# EAGLE board connector (EAGLE 7.3.0)
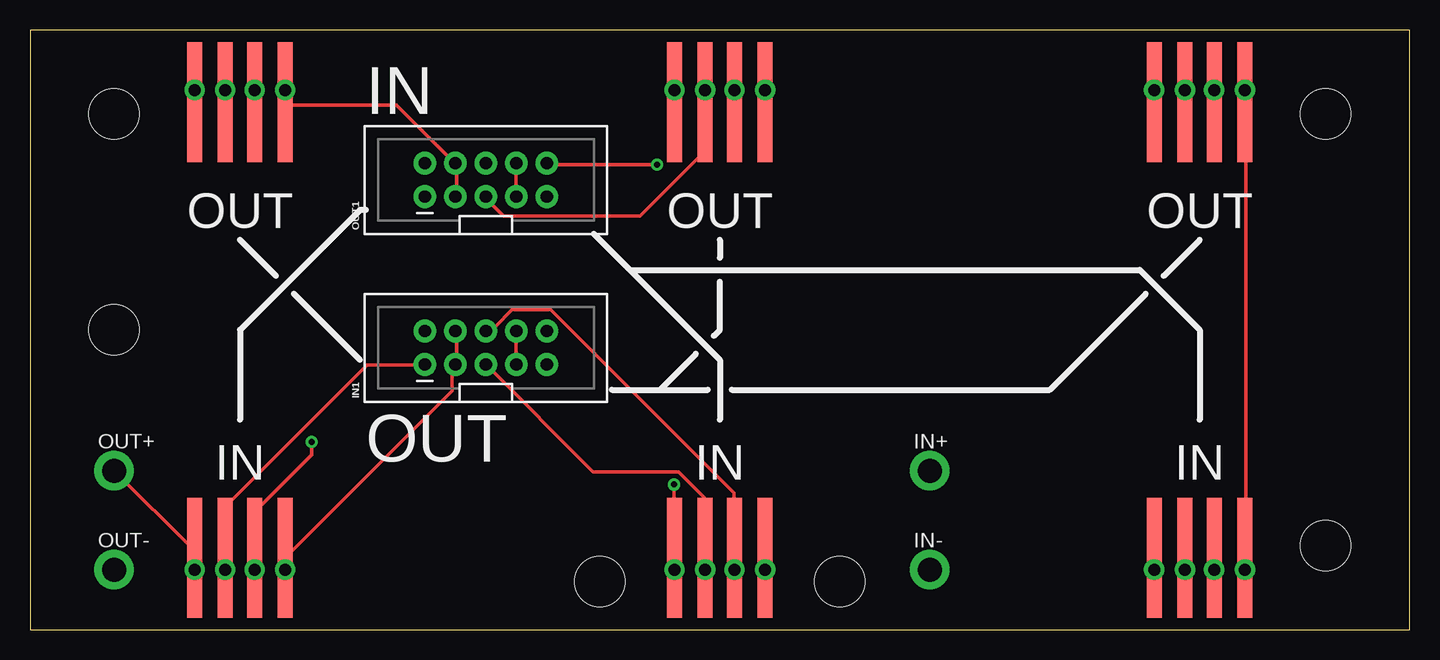
[diagram p0: board, top side]
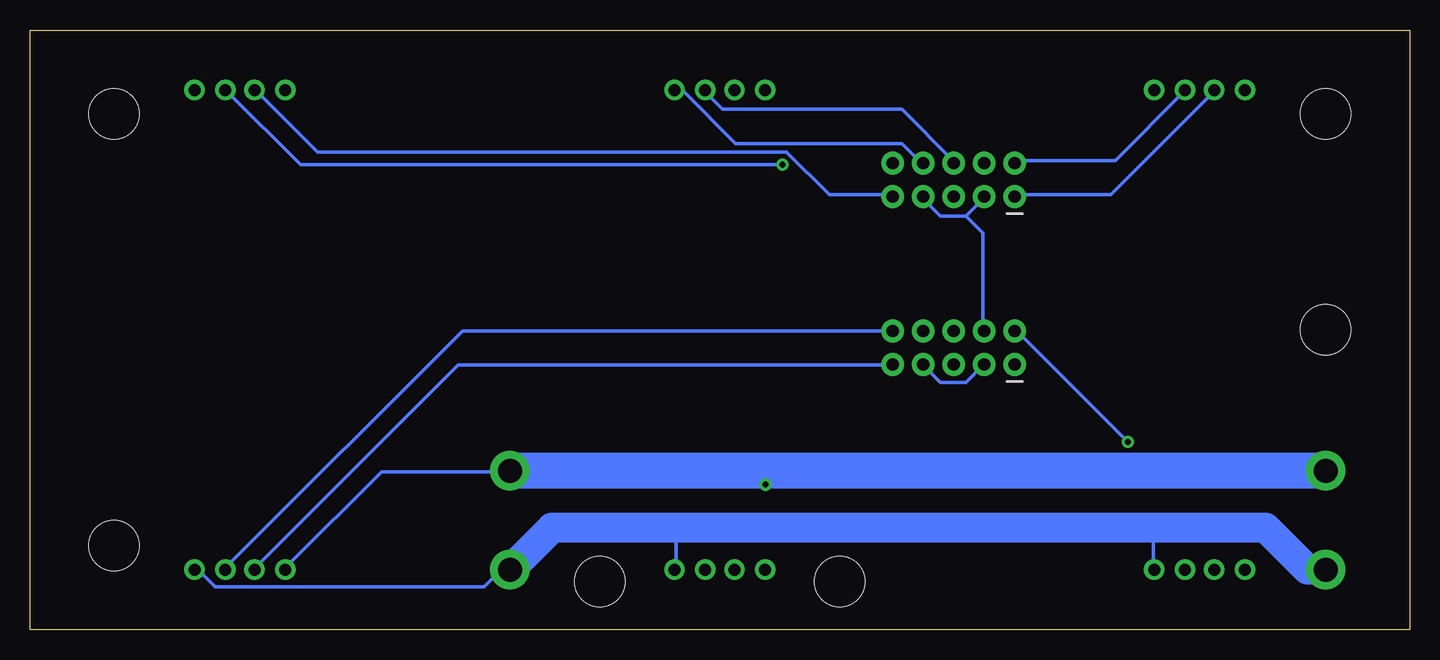
[diagram p1: board, bottom side, seen from below]

Size 115 x 50 mm. Coordinates in mm from the lower left corner, seen from the top.
Outline: 0,0 115,0 115,50 0,50 0,0
Copper layers (1*16): Top 0.035mm / dielectric 1.5mm / Bottom 0.035mm
Design rules "myRules_18_10_14 *": minimum track width 12mil, minimum drill 20mil, track to track 16mil, track to pad 14mil, pad to pad 8mil, via to via 12mil, smd to smd 8mil, copper to edge 10mil, drill to drill 8mil, minimum pad ring 12mil, minimum via ring 10mil, stop-mask expansion 4mil, vias tented up to drill 25mil, thermal gap 10mil
Holes 4.2 mm at 7,43 7,25 47.5,4 67.5,4 108,43 108,7

## Footprints (pad centres in the part's own frame; a part is rotated, then mirrored left to right if it is on the bottom)
2X5-SHROUDED_LOCK = drill 1.016 pad 1.88: 1 -1.397,5.08; 2 1.397,5.08; 3 -1.397,2.54; 4 1.397,2.54; 5 -1.397,0; 6 1.397,0; 7 -1.397,-2.54; 8 1.397,-2.54; 9 -1.397,-5.08; 10 1.397,-5.08
1X01_2MM = drill 2 pad 3.302: 1 0,0
APA102STRIP = smd 1.27 x 10: 5V 3.775,1; CLOCK 1.225,1; DATA -1.225,1; GND -3.775,1 | drill 1 pad 1.7: 5V2 3.775,0; CLOCK2 1.225,0; DATA2 -1.225,0; GND2 -3.775,0

## Placement (x,y rotation side)
IN1  [2X5-SHROUDED_LOCK]  38,23.5 90 top
IN+  [1X01_2MM]  75,13.25 0 top
IN-  [1X01_2MM]  75,5 0 top
INSTRIP1  APA102STRIP  [APA102STRIP]  17.5,5 0 top
INSTRIP2  APA102STRIP  [APA102STRIP]  57.5,5 0 top
INSTRIP3  APA102STRIP  [APA102STRIP]  97.5,5 0 top
OUT1  [2X5-SHROUDED_LOCK]  38,37.5 90 top
OUT+  [1X01_2MM]  7,13.25 0 top
OUT-  [1X01_2MM]  7,5 0 top
OUTSTRIP1  APA102STRIP  [APA102STRIP]  17.5,45 180 top
OUTSTRIP2  APA102STRIP  [APA102STRIP]  57.5,45 180 top
OUTSTRIP3  APA102STRIP  [APA102STRIP]  97.5,45 180 top

## Library data of the parts
IN1 OUT1 = SparkFun-Connectors; PROD_ID: CONN-08671; SF_ID: PRT-08506
IN+ IN- OUT+ OUT- = SparkFun-Connectors
INSTRIP1-INSTRIP3 OUTSTRIP1-OUTSTRIP3 = LucasParis

## Nets
GND: IN1.3 IN1.4 IN1.7 IN1.8 IN-.1 INSTRIP1.5V INSTRIP1.5V2 INSTRIP2.5V INSTRIP2.5V2 INSTRIP3.5V INSTRIP3.5V2 OUT1.3 OUT1.4 OUT1.7 OUT1.8 OUT-.1 OUTSTRIP1.GND OUTSTRIP1.GND2 OUTSTRIP2.GND OUTSTRIP2.GND2 OUTSTRIP3.GND OUTSTRIP3.GND2
N$1: IN1.9 INSTRIP3.DATA INSTRIP3.DATA2
N$2: IN1.10 INSTRIP3.CLOCK INSTRIP3.CLOCK2
N$3: IN1.5 INSTRIP2.DATA INSTRIP2.DATA2
N$4: IN1.6 INSTRIP2.CLOCK INSTRIP2.CLOCK2
N$5: IN1.1 INSTRIP1.DATA INSTRIP1.DATA2
N$6: IN1.2 INSTRIP1.CLOCK INSTRIP1.CLOCK2
N$8: IN+.1 INSTRIP1.GND INSTRIP1.GND2 INSTRIP2.GND INSTRIP2.GND2 INSTRIP3.GND INSTRIP3.GND2 OUT+.1
N$9: OUT1.9 OUTSTRIP3.CLOCK OUTSTRIP3.CLOCK2
N$10: OUT1.10 OUTSTRIP3.DATA OUTSTRIP3.DATA2
N$11: OUT1.5 OUTSTRIP2.CLOCK OUTSTRIP2.CLOCK2
N$12: OUT1.6 OUTSTRIP2.DATA OUTSTRIP2.DATA2
N$13: OUT1.1 OUTSTRIP1.CLOCK OUTSTRIP1.CLOCK2
N$14: OUT1.2 OUTSTRIP1.DATA OUTSTRIP1.DATA2

## Tracks (layer width: path | path; a pad name or v marks a point on that pad's centre or on a via)
GND
  Top 0.305: OUTSTRIP2.GND2 61.16,44.81 61.16,44.09 OUTSTRIP2.GND | OUTSTRIP1.GND2 21.34,44.81 21.34,44.09 OUTSTRIP1.GND 21.34,43.74 30.58,43.74 35.2,39.12 OUT1.4 35.56,38.76 35.56,36.27 OUT1.3 | IN1.4 35.56,24.89 35.56,22.4 IN1.3 35.2,22.05 35.2,19.91 21.34,6.04 INSTRIP1.5V 21.34,5.69 21.34,5.33 INSTRIP1.5V2 | IN1.7 40.54,22.4 IN1.8 | OUT1.7 40.54,36.27 40.54,38.76 OUT1.8 | OUTSTRIP3.GND2 101.35,44.81 101.35,44.09 OUTSTRIP3.GND 101.35,43.74 101.35,6.04 INSTRIP3.5V 101.35,5.69 101.35,5.33 INSTRIP3.5V2 | INSTRIP2.5V2 61.16,5.33 61.16,5.69 INSTRIP2.5V
  Bottom 0.305: IN1.3 35.56,22.05 36.98,20.62 39.12,20.62 40.54,22.05 IN1.7 | 36.98,34.49 35.56,35.92 OUT1.3 | 36.98,34.49 39.12,34.49 40.54,35.92 OUT1.7 | 36.98,34.49 35.56,33.07 35.56,25.25 IN1.4 | OUTSTRIP2.GND2 61.16,44.81 60.45,44.81 56.19,40.54 42.32,40.54 40.89,39.12 OUT1.8 | 21.34,8.5 21.34,5.33 INSTRIP1.5V2 | 61.16,8.5 61.16,5.33 INSTRIP2.5V2 | INSTRIP3.5V2 100.99,4.98 99.57,3.56 77.17,3.56 76.1,4.62 IN-.1
  Bottom 2.5: OUT-.1 8.5,5 12,8.5 21.34,8.5 61.16,8.5 71.5,8.5 IN-.1
N$1
  Top 0.305: INSTRIP3.DATA2 96.37,5.33 96.37,5.69 INSTRIP3.DATA
  Bottom 0.305: IN1.9 43.38,22.05 79.3,22.05 96.01,5.33 INSTRIP3.DATA2
N$2
  Top 0.305: INSTRIP3.CLOCK2 98.86,5.33 98.86,5.69 INSTRIP3.CLOCK
  Bottom 0.305: IN1.10 43.38,24.89 78.94,24.89 98.5,5.33 INSTRIP3.CLOCK2
N$3
  Top 0.305: INSTRIP2.DATA2 56.19,5.33 56.19,5.69 INSTRIP2.DATA 56.19,6.04 56.19,11.02 54.05,13.16 46.94,13.16 38.05,22.05 IN1.5
N$4
  Top 0.305: INSTRIP2.CLOCK2 58.67,5.33 58.67,5.69 INSTRIP2.CLOCK 58.67,6.04 58.67,11.38 43.38,26.67 40.18,26.67 38.76,25.25 38.05,25.25 IN1.6
N$5
  Top 0.305: INSTRIP1.DATA2 16.36,5.33 16.36,5.69 INSTRIP1.DATA 16.36,6.04 16.36,10.31 28.09,22.05 32.72,22.05 IN1.1
N$6  (via drill 0.51)
  Top 0.305: INSTRIP1.CLOCK2 18.85,5.33 18.85,5.69 INSTRIP1.CLOCK 18.85,6.04 18.85,9.96 23.47,14.58 v23.47,15.65
  Bottom 0.305: v23.47,15.65 32.72,24.89 IN1.2
N$8  (via drill 0.51)
  Top 0.305: INSTRIP2.GND2 53.7,5.33 53.7,5.69 INSTRIP2.GND 53.7,6.04 v53.7,12.09 | INSTRIP1.GND2 13.87,5.33 13.87,5.69 INSTRIP1.GND 13.51,6.04 13.51,6.76 7.11,13.16 OUT+.1 | INSTRIP3.GND2 93.88,5.33 93.88,5.69 INSTRIP3.GND
  Bottom 0.305: IN+.1 76.45,13.16 85.7,13.16 93.52,5.33 INSTRIP3.GND2 | v53.7,12.09 53.7,13.25
  Bottom 3: OUT+.1 53.7,13.25 IN+.1
N$9
  Top 0.305: OUTSTRIP3.CLOCK2 96.37,44.81 96.37,44.09 OUTSTRIP3.CLOCK
  Bottom 0.305: OUT1.9 43.38,36.27 48.36,36.27 51.92,39.83 91.03,39.83 96.01,44.81 OUTSTRIP3.CLOCK2
N$10  (via drill 0.51)
  Top 0.305: OUTSTRIP3.DATA2 98.86,44.81 98.86,44.09 OUTSTRIP3.DATA | v52.27,38.76 43.38,38.76 OUT1.10
  Bottom 0.305: v52.27,38.76 92.46,38.76 98.5,44.81 OUTSTRIP3.DATA2
N$11
  Top 0.305: OUTSTRIP2.CLOCK2 56.19,44.81 56.19,44.09 OUTSTRIP2.CLOCK 56.19,43.74 56.19,39.83 50.85,34.49 39.47,34.49 38.05,35.92 OUT1.5
N$12
  Top 0.305: OUTSTRIP2.DATA2 58.67,44.81 58.67,44.09 OUTSTRIP2.DATA
  Bottom 0.305: OUT1.6 38.05,39.12 42.32,43.38 57.25,43.38 58.67,44.81 OUTSTRIP2.DATA2
N$13
  Top 0.305: OUTSTRIP1.CLOCK2 16.36,44.81 16.36,44.09 OUTSTRIP1.CLOCK
  Bottom 0.305: OUT1.1 32.72,36.27 24.89,36.27 16.36,44.81 OUTSTRIP1.CLOCK2
N$14
  Top 0.305: OUTSTRIP1.DATA2 18.85,44.81 18.85,44.09 OUTSTRIP1.DATA
  Bottom 0.305: OUT1.2 32.72,39.12 24.54,39.12 18.85,44.81 OUTSTRIP1.DATA2

## Text on the board
tNames: IN | OUT | OUT | OUT | OUT | IN | IN | IN